# Altium PCB MotionDetectorPCB.PcbDoc
Units mil, origin at the board's own origin, x right, y up, seen from the top; angles counter-clockwise.
Board outline 810 x 1000 mil, 2 copper layers (Top Layer, Bottom Layer); 8 components, 9 nets, 29 pads, 4 vias.
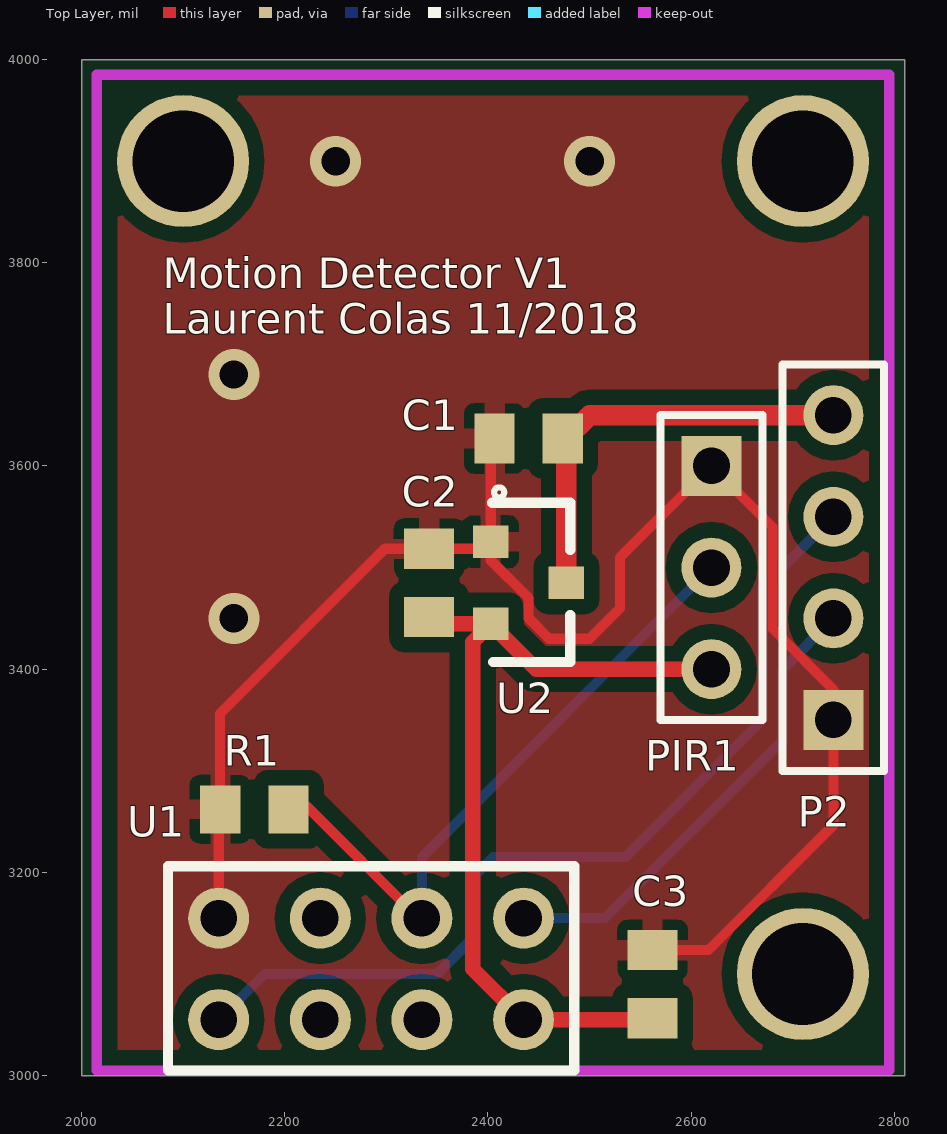
[diagram p0: Top Layer view]
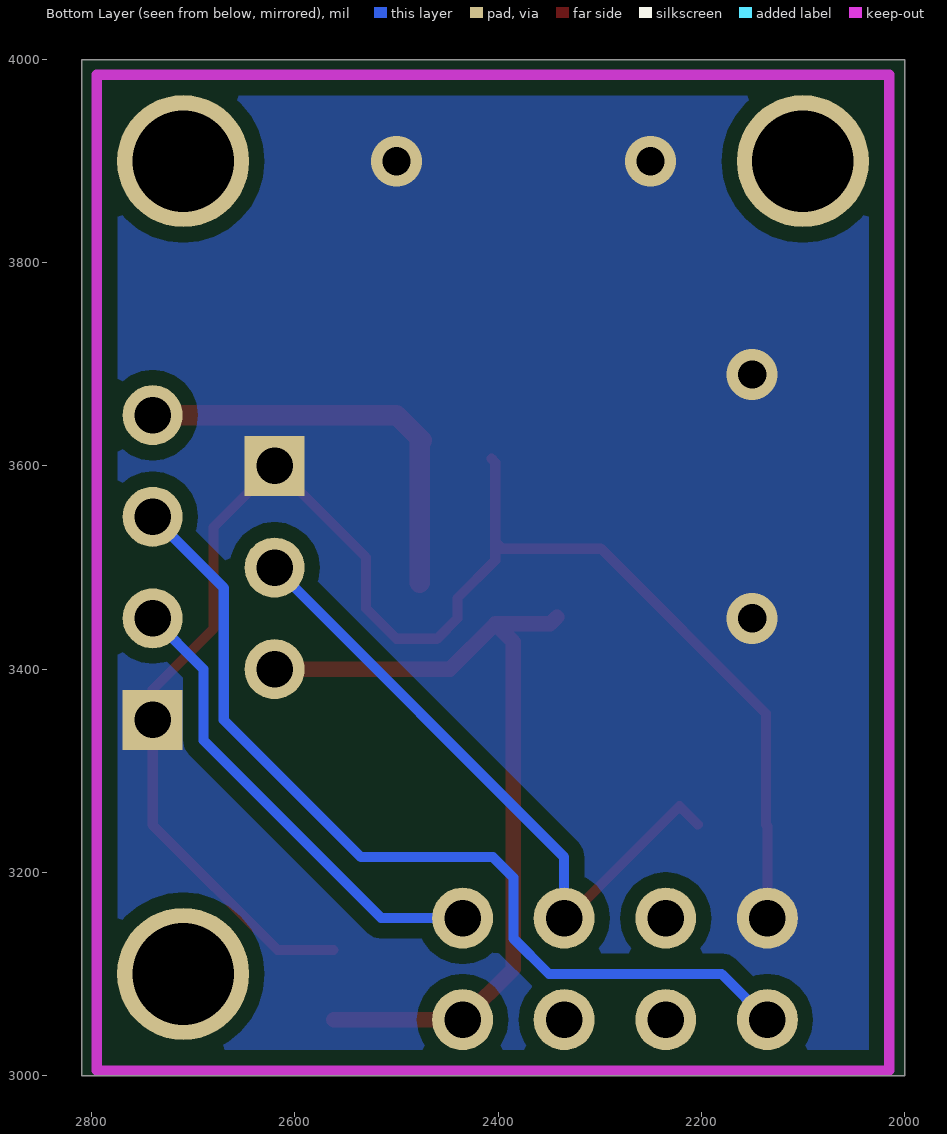
[diagram p1: Bottom Layer view, seen from below]

## Layer stack, top to bottom
Top Solder: solder mask 0.4, Solder Resist, Dk 3.5
Top Layer: signal copper 1.4
Dielectric 1: dielectric 12.6, FR-4, Dk 4.8
Bottom Layer: signal copper 1.4
Bottom Solder: solder mask 0.4, Solder Resist, Dk 3.5

## Board outline
2000,3000 2810,3000 2810,4000 2000,4000

## Design rules (kind name [scope] priority, off if disabled: settings)
Clearance Clearance_1 [InNamedPolygon('Top Layer-No Net')] p1: gap=15 ignorepadtopadclearanceinfootprint=FALSE
Clearance [All] p2: gap=8 ignorepadtopadclearanceinfootprint=FALSE
HoleSize [All] p1: absolutevalues=TRUE maxlimit=200 minlimit=1 maxpercent=80.000 minpercent=20.000
PolygonConnect PolygonConnect_1 [All vs IsNamedPolygon('Top Layer-No Net')] p1: thpad.connectstyle=Direct thpad.reliefconductorwidth=10 thpad.reliefentries=4 thpad.polygonreliefangle="90 Angle" thpad.airgapwidth=10 smdpad.connectstyle=Relief smdpad.reliefconductorwidth=20 smdpad.reliefentries=4 smdpad.polygonreliefangle="90 Angle" smdpad.airgapwidth=10 via.connectstyle=Direct via.reliefconductorwidth=10 via.reliefentries=4 via.polygonreliefangle="90 Angle" via.airgapwidth=10
PolygonConnect [All] p2: connectstyle=Relief reliefconductorwidth=10 reliefentries=4 polygonreliefangle="90 Angle" airgapwidth=10
RoutingVias [All] p1: holewidth=25 width=40 viastyle="Through Hole" minholewidth=28 minwidth=50 maxholewidth=28 maxwidth=50
SolderMaskExpansion [All] p1: expansion=4
Width [All] p1: maxlimit=50 minlimit=10 preferedwidth=10
29 further rules are at their usual default settings.

## Components (designator, comment, footprint, x,y, rotation, side; value= is the part's Value field where it differs from the comment)
C1 "Cap" CAP_0804 2440,3630 r0 top value=1uF
C2 "Cap" CAP_0804 2345,3485 r270 top value=1uF
C3 "Cap" CAP_0804 2565,3090 r270 top value=1uF
P2 "Header 4" HDR1X4 2740,3350 r90 top
PIR1 "Header 3" HDR1X3 2620,3600 r270 top
R1 "Res1" RES_0804_PANASONIC 2170,3265 r0 top value=4.7k
U1 "ESP-01" ESP-01 2285,3005 r90 top
U2 "Voltage Reg" SOT-23 2440,3485 r270 top value=Value

## Footprints (in the part's own frame and the unit in brackets; to place one, negate y for a bottom-side part, rotate by r counter-clockwise, add the part's x,y. Pads: shape width x height; smd on the part's side, far side on the other; paste and mask are expansions set on the pad)
CAP_0804 [mm]
  rect 1.006x1.25 smd: 1(-0.853,-0.075) 2(0.853,-0.075)
ESP-01 [mil]
  round 60 hole 36: 1(50,150) 2(150,150) 3(50,50) 4(150,50) 5(50,-50) 6(150,-50) 7(50,-150) 8(150,-150)
  silkscreen extent 0,-200 201,200
HDR1X3 [mm] "Connector; Header; 3 Position"
  rect 1.5x1.5 hole 0.914: 1(0,0)
  round 1.5 hole 0.914: 2(2.54,0) 3(5.08,0)
  silkscreen extent -1.27,-1.27 6.35,1.27
HDR1X4 [mm] "Connector; Header; 4 Position"
  rect 1.5x1.5 hole 0.914: 1(0,0)
  round 1.5 hole 0.914: 2(2.54,0) 3(5.08,0) 4(7.62,0)
  silkscreen extent -1.27,-1.27 8.89,1.27
RES_0804_PANASONIC [mm]
  rect 1.006x1.2 smd: 1(-0.853,-0.075) 2(0.853,-0.075)
SOT-23 [mil]
  rect 32x35 smd paste+0: 1(-40.35,-37.2) 2(40.35,-37.2) 3(0,37.2)
  silkscreen extent -94,-36 78,41

## Part data
C1 C2 C3: "Capacitor", LatestRevisionDate=17-Jul-2002, LatestRevisionNote="Re-released for DXP Platform.", PackageDescription="Radial Cap, Thru-Hole; 2 Leads; 0.3 in Pin Spacing", PackageReference=RAD-0.3, Published=8-Jun-2000, Publisher="Altium Limited"
P2: "Header, 4-Pin", LatestRevisionDate=17-Jul-2002, LatestRevisionNote="Re-released for DXP Platform.", Publisher="Altium Limited"
PIR1: "Header, 3-Pin", LatestRevisionDate=17-Jul-2002, LatestRevisionNote="Re-released for DXP Platform.", Publisher="Altium Limited"
R1: "Resistor", LatestRevisionDate=17-Jul-2002, LatestRevisionNote="Re-released for DXP Platform.", PackageDescription="Axial Device, Thru-Hole; 2 Leads; 0.3 in Pin Spacing", PackageReference=AXIAL-0.3, Published=8-Jun-2000, Publisher="Altium Limited"
U2: library part AP2120N-3.3TRG1, Built_By=EMA_UL_Team, Manufacturer_Part_Number=AP2120N-3.3TRG1, RefDes=RefDes, Type=DEV, Vendor="Diodes Inc"

## Free pads (board coordinates)
  round 130 hole 100: ""(2100,3900) ""(2710,3100) ""(2710,3900)

## Via types
v1: diameter 50, hole 28, Top Layer to Bottom Layer, 4 vias

## Nets (pads, with @x,y where several pads share a name; then routed paths per layer and width w, separated by ;. In a path a pad name is that pad's centre, name@x,y a point inside that pad or via, vN(x,y) a via of type N, cw(c..) or ccw(c..) an arc to the next point about the centre after c; other vN are vias at no path point)
+5V: C1.2 P2.4 U2.3 | length 416
  Top Layer w20: U2.3 2477.2,3623.42 2475.31,3625.31 2500,3650 P2.4
EN: U1.3
GND: C1.1 C2.1 C3.1 P2.1 PIR1.1 R1.1 U1.2 U2.1 | length 1632.4
  Top Layer w10: U1.2 2135,3245.62 2136.43,3247.05 R1.1 2136.43,3356.43 2298.57,3518.57 C2.1 2396.02,3518.57 U2.1 ; C1.1@2406.43,3607.05 2402.8,3603.42 U2.1 ; C3.1 2617.05,3123.57 2740,3246.53 P2.1 2740,3380 2680,3440 2680,3540 PIR1.1 2530,3510 2530,3460 2500,3430 2460,3430 2440,3450 2440,3470 2402.8,3507.2 U2.1
  other v1: 2150,3450 2150,3690 2250,3900 2500,3900
IO0: PIR1.2 R1.2 U1.6 | length 654.5
  Top Layer w10: R1.2@2203.57,3247.05 2221.53,3265 2331.53,3155 U1.6 U1.6@2340,3160
  Bottom Layer w10: U1.6 2335,3215 PIR1.2
IO2: U1.4
RST: U1.5
RX: P2.3 U1.1 | length 921.3
  Bottom Layer w10: U1.1 2180,3100 2350,3100 2385,3135 2385,3195 2405,3215 2535,3215 2670,3350 2670,3480 P2.3
TX: P2.2 U1.8 | length 468.2
  Bottom Layer w10: U1.8 2515,3155 2690,3330 2690,3400 P2.2
VCC: C2.2 C3.2 PIR1.3 U1.7 U2.2 | length 844
  Top Layer w15: C2.2 2348.83,3444.65 U2.2 ; C3.2@2562.05,3055 U1.7 2385,3105 2385,3426.85 U2.2 ; PIR1.3 2447.44,3400 U2.2

## Polygon pours and split planes (outlines as drawn)
GND on Top Layer "Top Layer-No Net" (solid, remove dead copper, pour order 2): 2000,4000 2000,3000 2810,3000 2810,4000
GND on Bottom Layer "Top Layer-No Net" (solid, remove dead copper, pour order 4): 2000,4000 2810,4000 2810,3000 2000,3000

## Keep-outs
Keep-Out Layer:
  lines w10: 2015,3005 2015,3985 2795,3985 2795,3005 2015,3005

## Silkscreen, mask and mechanical layers (free items; w line width, h text height)
Top Overlay:
  text "Motion Detector V1 / Laurent Colas 11/2018" at 2080,3730 h30
Mechanical 1:
  the board outline again, w10